# Altium PCB Intelligent_Agriculture_Power.PcbDoc
Units mil, origin at the board's own origin, x right, y up, seen from the top; angles counter-clockwise.
Board outline 3925 x 3925 mil, 2 copper layers (Top Layer, Bottom Layer); 35 components, 24 nets, 91 pads, 7 vias.
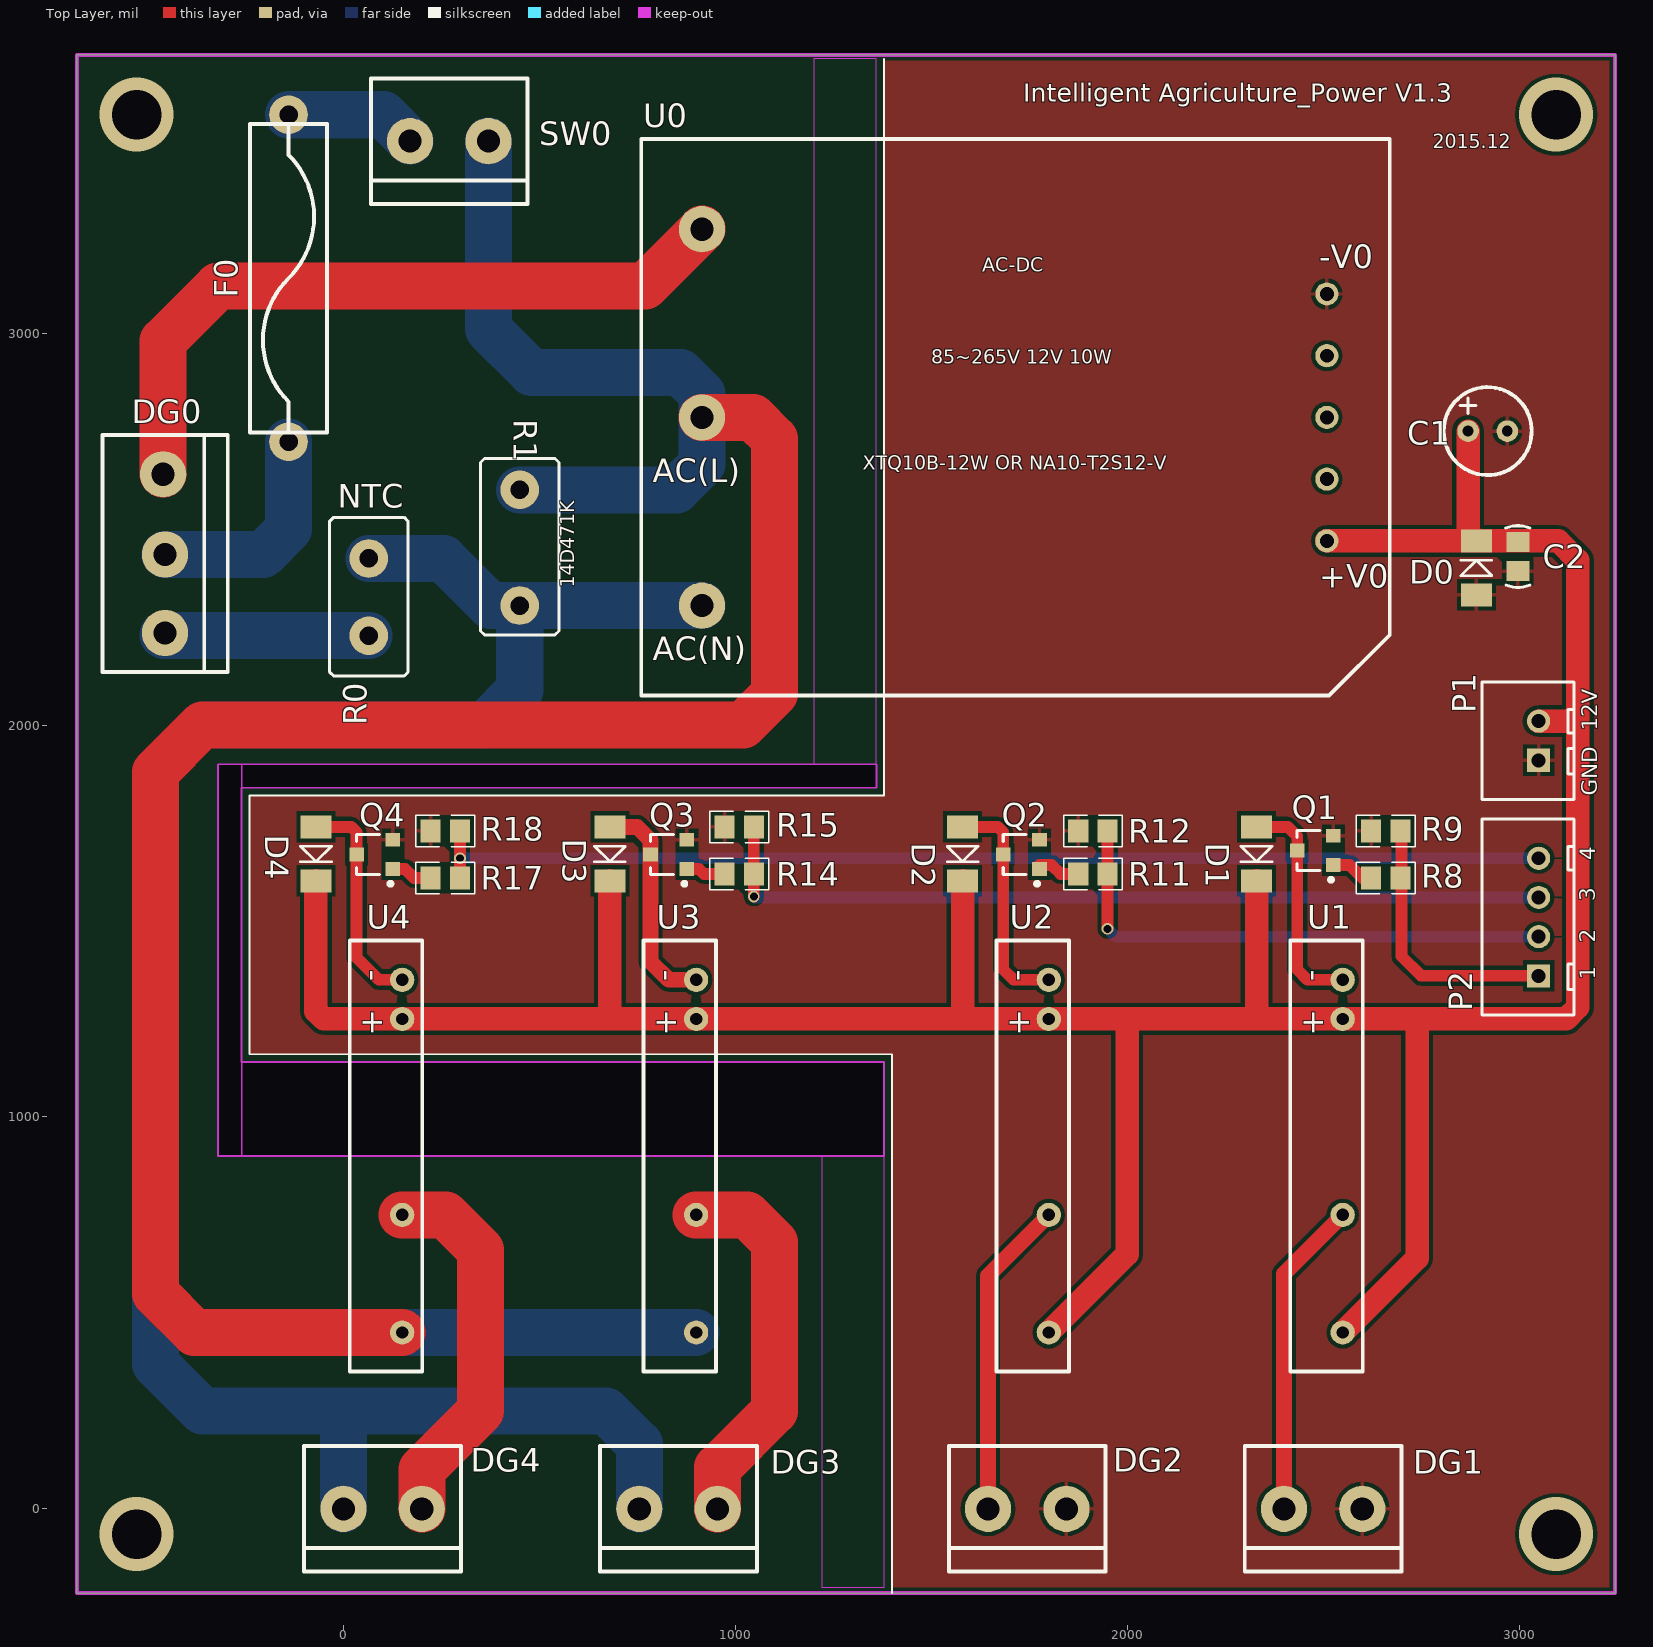
[diagram p0: Top Layer view]
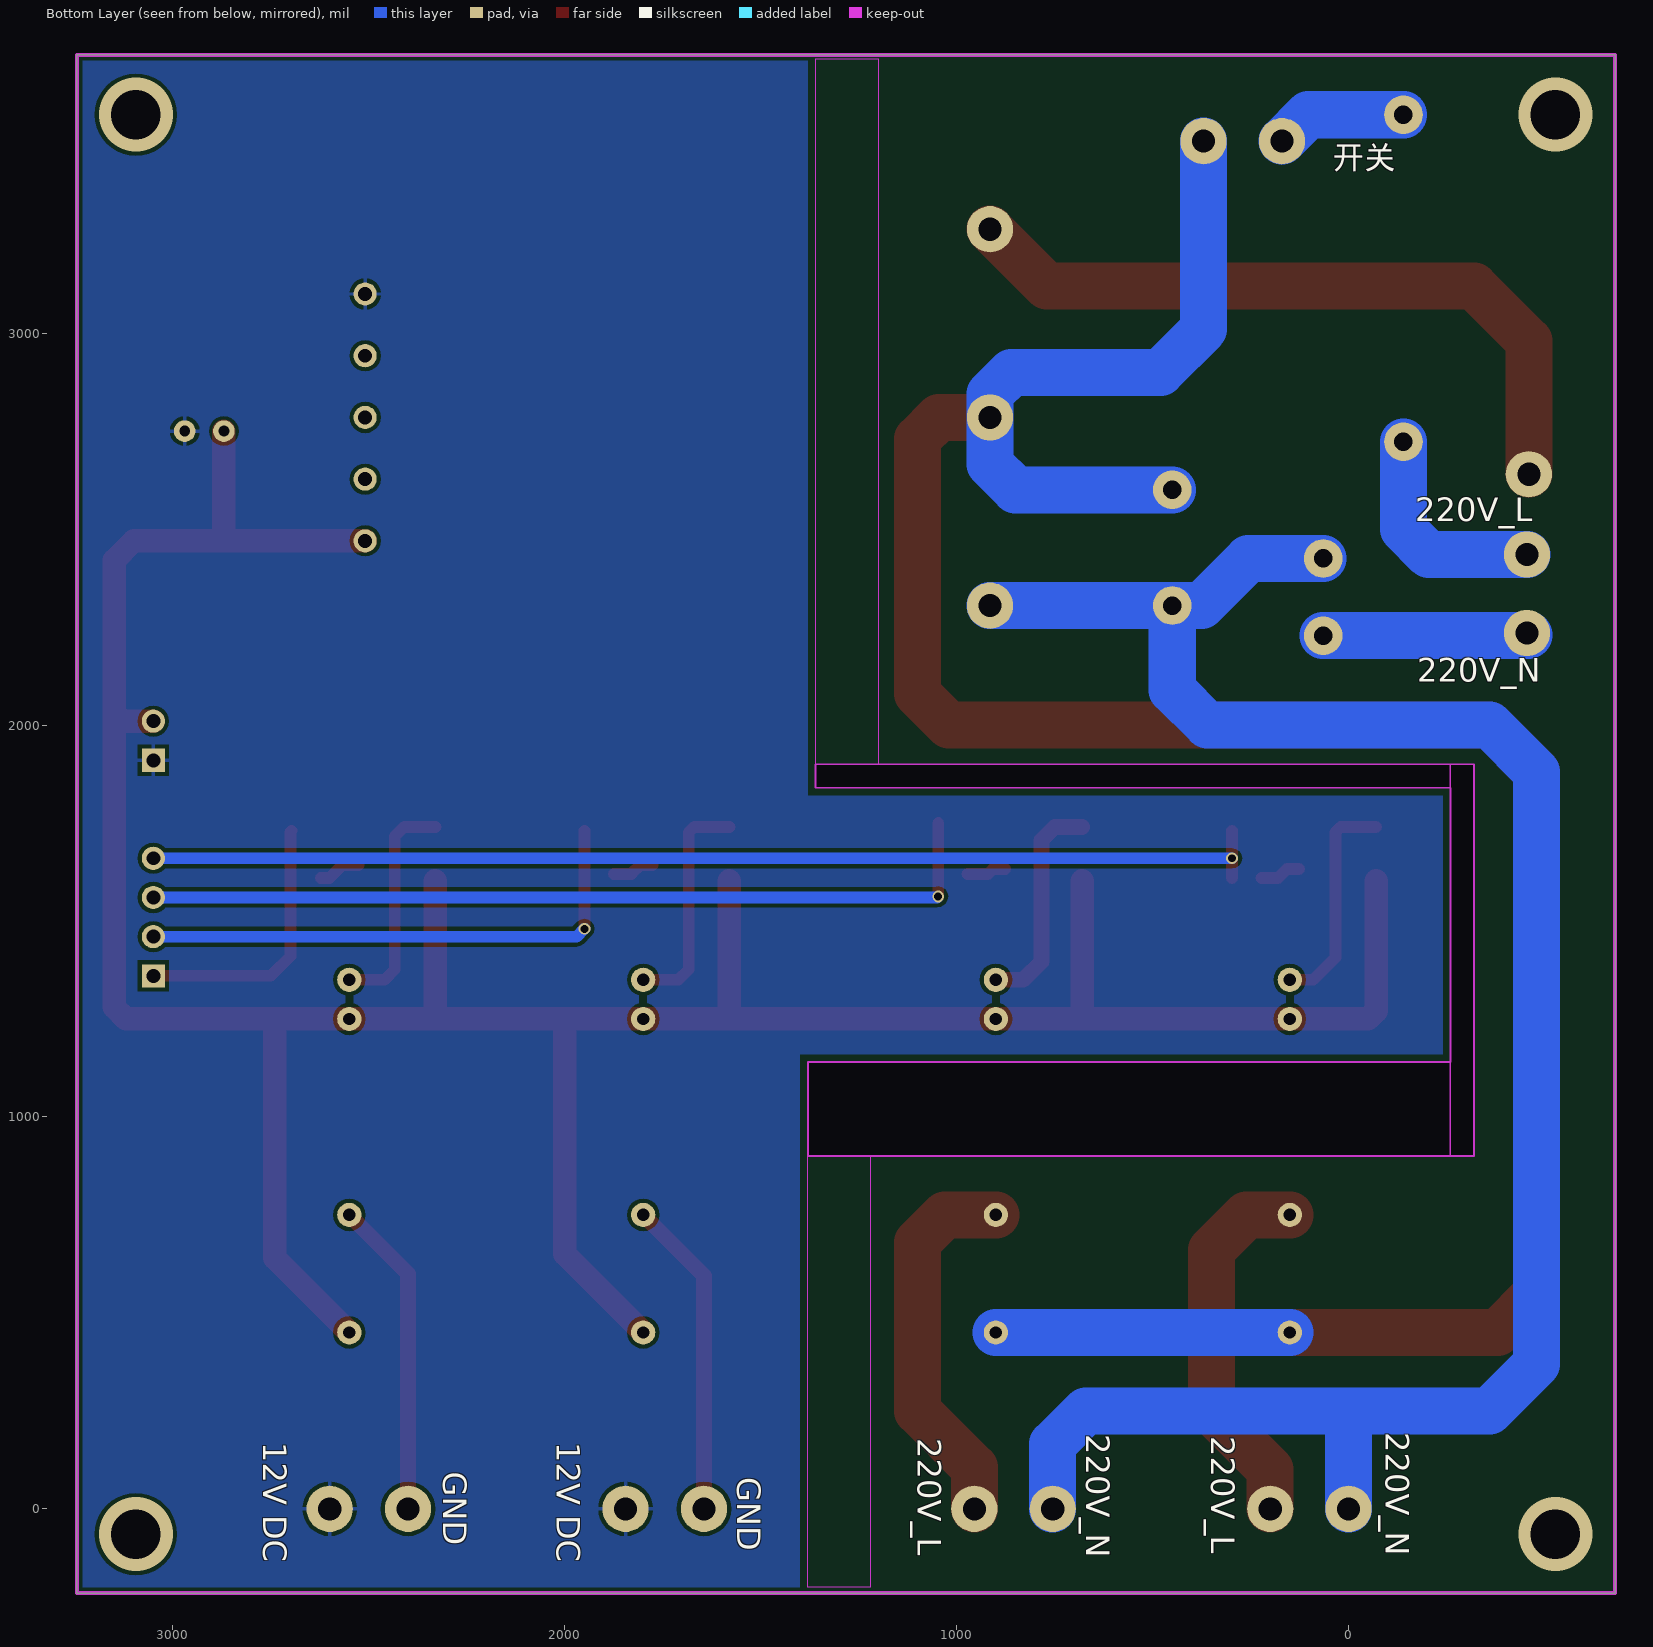
[diagram p1: Bottom Layer view, seen from below]

## Layer stack, top to bottom
Top Layer: signal copper 1.4
Dielectric: dielectric 12.6, FR-4, Dk 4.8
Bottom Layer: signal copper 1.4

## Board outline
-680,-215 3245,-215 3245,3710 -680,3710
cut-out: -320,1900 -320,900 -260,900 -260,1900
cut-out: -260,1900 -260,1840 1360,1840 1360,1900
cut-out: -260,900 1380,900 1380,1140 -260,1140

## Design rules (kind name [scope] priority, off if disabled: settings)
Clearance [All] p1: gap=10
PolygonConnect [All] p1: connectstyle=Relief reliefconductorwidth=10 reliefentries=4 polygonreliefangle="90 Angle"
RoutingVias [All] p1: holewidth=28 width=50 viastyle="Through Hole" minholewidth=28 minwidth=50 maxholewidth=28 maxwidth=50
SilkscreenOverComponentPads SilkToSolderMaskClearance [IsPad] p1: minsilkscreentomaskgap=10
SolderMaskExpansion [All] p1: expansion=4
Width [All] p1: maxlimit=120 minlimit=30 preferedwidth=30
27 further rules are at their usual default settings.

## Components (designator, comment, footprint, x,y, rotation, side; value= is the part's Value field where it differs from the comment)
C1 "Cap Pol1" C-RB-2.54 2920,2750 r0 top
C2 "Cap" C-RAD-0805 2997,2430 r270 top
D0 "Diode" DIODE-1206 2891,2332 r90 top
D1 "Diode" DIODE-1206 2330,1740 r270 top
D2 "Diode" DIODE-1206 1580,1740 r270 top
D3 "Diode" DIODE-1206 680,1740 r270 top
D4 "Diode" DIODE-1206 -70,1740 r270 top
DG0 "Header 3" DG301-3P -460,2440 r90 top
DG1 "Header 2" DG301-2P 2505,5 r0 top
DG2 "Header 2" DG301-2P 1750,5 r0 top
DG3 "Header 2" DG301-2P 860,5 r0 top
DG4 "Header 2" DG301-2P 105,5 r0 top
F0 "Fuse" FUSE-20*5*2A -140,3140 r90 top
P1 "Header 2" HDR2X1_B1 3050,1910 r90 top
P2 "Header 4" HDR4X1_B1 3050,1360 r90 top
Q1 "S8050" SOT-23 2480,1680 r90 top
Q2 "S8050" SOT-23 1730,1670 r90 top
Q3 "S8050" SOT-23 830,1670 r90 top
Q4 "S8050" SOT-23 80,1670 r90 top
R0 "NTC" "NTC 5D-9" 70,2325 r90 top
R1 "MOV" 14D471K 450,2305 r90 top
R8 "Res1" 0805-1 2660,1610 r0 top
R9 "Res1" 0805-1 2660,1730 r180 top
R11 "Res1" 0805-1 1912.6,1620 r0 top
R12 "Res1" 0805-1 1912.6,1730 r180 top
R14 "Res1" 0805-1 1010,1620 r0 top
R15 "Res1" 0805-1 1010,1740 r180 top
R17 "Res1" 0805-1 260,1610 r0 top
R18 "Res1" 0805-1 260,1730 r180 top
SW0 "Header 2" DG301-2P 275,3495 r0 top
U0 "ACDC_12V10W" ACDC_XTQ10B-12W 915,2785 r0 top
U1 "RL-G3MC-202P-DC12" RL-G3MC-202P-DC12 2550,450 r270 top
U2 "RL-G3MC-202P-DC12" RL-G3MC-202P-DC12 1800,450 r270 top
U3 "RL-G3MC-202P-DC12" RL-G3MC-202P-DC12 900,450 r270 top
U4 "RL-G3MC-202P-DC12" RL-G3MC-202P-DC12 150,450 r270 top

## Footprints (in the part's own frame and the unit in brackets; to place one, negate y for a bottom-side part, rotate by r counter-clockwise, add the part's x,y. Pads: shape width x height; smd on the part's side, far side on the other; paste and mask are expansions set on the pad)
14D471K [mm]
  round 2.5 hole 1.2: 1(0,0) 2(7.5,0)
  silkscreen extent -1.91,-2.54 9.53,2.54
0805-1 [mm]
  rect 1.3x1.5 smd: 1(-0.95,0) 2(0.95,0)
  silkscreen extent -1.91,-1.02 1.91,1.02, body extent -1.14,-0.51 1.14,0.51, height 1
ACDC_XTQ10B-12W [mm] "220VAC转12VDC模块X"
  round 3 hole 1.5: 1(0,12.2) 2(0,0) 3(0,-12.2)
  round 1.5 hole 0.9: 4(40.5,8) 5(40.5,4) 6(40.5,0) 7(40.5,-4) 8(40.5,-8)
  silkscreen extent -3.94,-18.03 44.58,18.03
C-RAD-0805 [mm]
  rect 1.3x1.5 smd: 1(-0.95,0) 2(0.95,0)
  silkscreen extent -2,-0.79 2,0.79, body extent -1.27,-0.64 1.27,0.64, height 0.9
C-RB-2.54 [mm]
  round 1.4 hole 0.7: 1(-1.27,0) 2(1.27,0)
  silkscreen extent -2.85,-2.85 2.85,2.85
DG301-2P [mm]
  round 3 hole 1.5: 1(-2.667,-0.127) 2(2.413,-0.127)
  silkscreen extent -5.21,-4.19 4.95,3.94
DG301-3P [mm]
  round 3 hole 1.5: 1(-5.207,-0.127) 2(-0.127,-0.127) 3(5.08,0)
  silkscreen extent -7.75,-4.19 7.62,3.94
DIODE-1206 [mm]
  rect 1.5x2 smd: 1(0,0) 2(3.5,0)
  silkscreen extent 1.25,-1 2.25,1
FUSE-20*5*2A [mm] "20*5*2A ²£Á"
  round 2.5 hole 1.2: 1(-10.6,0) 2(10.6,0)
  silkscreen extent -10,-2.5 10,2.5
HDR2X1_B1 [mm] "Connector; Header; 4"
  rect 1.5x1.5 hole 0.9: 1(0,0)
  round 1.5 hole 0.9: 2(2.54,0)
  silkscreen extent -2.54,-2.29 5.08,3.68, body extent -2.41,-2.16 5.08,3.56, height 1.5
HDR4X1_B1 [mm] "Connector; Header; 4"
  rect 1.5x1.5 hole 0.9: 1(0,0)
  round 1.5 hole 0.9: 2(2.54,0) 3(5.08,0) 4(7.62,0)
  silkscreen extent -2.54,-2.29 10.16,3.68, body extent -2.41,-2.16 10.03,3.56, height 1.5
"NTC 5D-9" [mm]
  round 2.5 hole 1.2: 1(-2.46,0.127) 2(2.54,0.127)
  silkscreen extent -5.08,-2.41 5.21,2.67
RL-G3MC-202P-DC12 [mm] "12V ¹"
  round 1.57 hole 0.8: 1(0,0) 2(-7.62,0) 3(-20.32,0) 4(-22.86,0)
  silkscreen extent -25.4,-3.4 2.54,1.3
SOT-23 [mm]
  rect 0.9x0.95 smd: 1(-0.95,-1.175) 2(0.95,-1.175) 3(0,1.175)
  silkscreen extent -2.03,-1.14 1.3,1.18

## Part data
C1: "µç½âµ"
C2: "无极性"
D0 D1 D2 D3 D4: "二极"
DG0: "接插"
DG1 DG2 DG3 DG4 P1 P2 SW0: library part He, "接插件"
F0: library part "Fuse 2", "保险丝"
Q1 Q2 Q3 Q4: library part BCP68, "NPN三极"
R0: "ÈÈÃôµ"
R1: "Ñ¹Ãôµ"
R8 R9 R11 R12 R14 R15 R17 R18: library part R, "ÌùÆ¬µ"
U0: library part ACDC_, "ACDC模块_220VAC转12VDC"
U1 U2 U3 U4: "12V 固态继电器"

## Via types
v1: diameter 188.98, hole 125.98, Top Layer to Bottom Layer, 4 vias
v2: diameter 30, hole 20, Top Layer to Bottom Layer, 3 vias

## Nets (pads, with @x,y where several pads share a name; then routed paths per layer and width w, separated by ;. In a path a pad name is that pad's centre, name@x,y a point inside that pad or via, vN(x,y) a via of type N, cw(c..) or ccw(c..) an arc to the next point about the centre after c; other vN are vias at no path point)
GND: C1.2 C2.2 D0.1 DG1.2 DG2.2 P1.1 Q1.2 Q2.2 Q3.2 Q4.2 R9.2 R12.2 R15.2 R18.2 U0.4
L220V: R1.2 SW0.2 U0.2 U3.1 U4.1 | length 7036.9
  Top Layer w120: U4.1 -380,450 -480,550 -480,1880 -360,2000 1020,2000 1100,2080 1100,2730 1045,2785 U0.2
  Bottom Layer w120: U4.1 U3.1 ; SW0.2 370,3010 480,2900 860,2900 915,2845 U0.2 915,2665.55 849.72,2600.28 R1.2
N220V: DG3.1 DG4.1 R0.2 R1.1 U0.3 | length 5366.3
  Bottom Layer w120: DG4.1 0,240 ; R0.2 255,2425 375,2305 R1.1 ; DG3.1 755,165 670,250 -360,250 -480,370 -480,1880 -360,2000 360,2000 450,2090 R1.1 ; U0.3@914.68,2305 R1.1
NetD1_1: D1.1 Q1.3 U1.4 | length 580.7
  Top Layer w30: D1.1 2410,1740 2433.74,1716.26 Q1.3 2433.74,1376.26 2460,1350 U1.4
NetD2_1: D2.1 Q2.3 U2.4 | length 586.6
  Top Layer w30: D2.1 1670,1740 1683.74,1726.26 1683.74,1680 1683.74,1376.26 1710,1350 U2.4
NetD3_1: D3.1 Q3.3 U3.4 | length 563.1
  Top Layer w40: D3.1 750,1740 783.74,1706.26 Q3.3 783.74,1396.26 830,1350 U3.4
NetD4_1: D4.1 Q4.3 U4.4 | length 569
  Top Layer w30: D4.1 20,1740 33.74,1726.26 Q4.3 33.74,1406.26 90,1350 U4.4
NetDG0_1: DG0.1 R0.1 | length 525.8
  Bottom Layer w120: DG0.1@-460,2230 -458.15,2228.15 R0.1
NetDG0_2: DG0.2 F0.1 | length 564.6
  Bottom Layer w120: DG0.2 -205,2435 -140,2500 F0.1
NetDG0_3: DG0.3 U0.1 | length 1833.2
  Top Layer w120: DG0.3 -460,2980 -320,3120 769.68,3120 U0.1
NetDG1_1: DG1.1 U1.2 | length 812.1
  Top Layer w40: DG1.1 2400,600 U1.2
NetDG2_1: DG2.1 U2.2 | length 814.2
  Top Layer w40: DG2.1 1645,595 U2.2
NetDG3_2: DG3.2 U3.2 | length 969.1
  Top Layer w120: U3.2 1030,750 1100,680 1100,250 955,105 DG3.2
NetDG4_2: DG4.2 U4.2 | length 959.4
  Top Layer w120: U4.2 260,750 350,660 350,250 200,100 DG4.2
NetF0_2: F0.2 SW0.1 | length 337.9
  Bottom Layer w120: F0.2 102.68,3557.32 SW0.1
NetQ1_1: Q1.1 R8.1 | length 109.8
  Top Layer w30: Q1.1 2567.4,1642.6 2600,1610 R8.1
NetQ2_1: Q2.1 R11.1 | length 108.3
  Top Layer w30: Q2.1@1776.26,1642.6 1807.4,1642.6 1830,1620 R11.1
NetQ3_1: Q3.1 R14.1 | length 101.6
  Top Layer w30: Q3.1 907.4,1632.6 920,1620 R14.1
NetQ4_1: Q4.1 R17.1 | length 105.7
  Top Layer w30: Q4.1 157.4,1632.6 180,1610 R17.1
RELAY1: P2.1 R8.2 R9.1 | length 691.8
  Top Layer w30: R9.1 2700,1727.4 2700,1410 2750,1360 P2.1
RELAY2: P2.2 R11.2 R12.1 | length 1358.3
  Top Layer w30: v2(1950,1480) R12.1
  Bottom Layer w30: v2(1950,1480) 1970,1460 P2.2
RELAY3: P2.3 R14.2 R15.1 | length 2187.4
  Top Layer w30: v2(1047.4,1562.6) R15.1@1047.4,1750
  Bottom Layer w30: v2@1050,1560 P2.3
RELAY4: P2.4 R17.2 R18.1 | length 2872.6
  Top Layer w30: R17.2 R18.1
  Bottom Layer w30: v2(297.4,1660) P2.4
VCC12V: C1.1 C2.1 D0.2 D1.2 D2.2 D3.2 D4.2 P1.2 U0.8 U1.1 U1.3 U2.1 U2.3 U3.3 U4.3 | length 8539.5
  Top Layer w60: D4.2 -70,1270 -50,1250 U4.3 710,1250 U3.3 1630,1250 U2.3 2000,1250 ; 680,1280 D3.2 ; 1580,1250 D2.2 ; U2.1 2000,650 2000,1250 ; 2330,1250 D1.2 ; U0.8 D0.2@2890.76,2470.04 ; U1.1 2740,640 2740,1230 ; C1.1 2870,2490.8 D0.2@2890.76,2470.04 ; D0.2 D0.2@2890.76,2470.04 ; P1.2 3130,2010 3150,2030 ; 2000,1250 2380,1250 U1.3 3120,1250 3150,1280 3150,2030 ; D0.2@2890.76,2470.04 2997,2470.04 3099.96,2470.04 3150,2420 3150,2030
pads on no net: U0.5 U0.6 U0.7
copper on no net:
  other v1: -527.52,-64.53 3094.53,-64.53 -527.52,3557.52 3094.53,3557.52

## Polygon pours and split planes (outlines as drawn)
GND on Top Layer "Keep-Out Layer-No Net" (solid, pour order 4): 1400,1160 -240,1160 -240,1820 1380,1820 1380,3710 3245,3710 3245,-215 1400,-215
GND on Bottom Layer "Keep-Out Layer-No Net" (solid, pour order 6): 1380,3710 1390,3700 3260,3700 3255,3700 3245,3710 3245,-215 1400,-215 1400,1160 -240,1160 -240,1820 1380,1820 1380,3700 1380,3710

## Keep-outs
Keep-Out Layer:
  region: 1360,3700 1200,3700 1200,1900 1360,1900
  rectangle: 1220,-200 1380,900
  lines w5: -320,900 -320,1900 1360,1900 1360,1840 -260,1840 -260,1140 1380,1140 1380,900 -320,900
  lines w10: -680,-215 -680,3710 3245,3710 3245,-215 -680,-215

## Silkscreen, mask and mechanical layers (free items; w line width, h text height)
Top Overlay:
  lines w5: -73,1160 1400,1160 1400,-215 ; -60,1160 -160,1160 -240,1160 -240,1820 1380,1820 1380,3700
  text "Intelligent Agriculture_Power V1.3" at 1735,3575 h80
  text "2015.12" at 2780,3460 h60
  text "12V" at 3200,1985 h40 r90
  text "GND" at 3200,1820 h40 r90
  text "4" at 3195,1655 h40 r90
  text "3" at 3195,1550 h40 r90
  text "2" at 3195,1445 h40 r90
  text "1" at 3195,1350 h40 r90
Bottom Overlay:
  text "开关" at 40,3400 h100
  text "220V_L" at -170,2520 h60
  text "220V_N" at -175,2110 h60
  text "220V_N" at -95,195 h60 r90
  text "220V_N" at 670,190 h60 r90
  text "220V_L" at 350,185 h60 r90
  text "220V_L" at 1100,180 h60 r90
  text "12V DC" at 2020,170 h60 r90
  text "12V DC" at 2770,170 h60 r90
  text "GND" at 2310,95 h60 r90
  text "GND" at 1560,80 h60 r90

## Text inside footprints (layer, text, board x,y; h text height)
R1: Top Overlay "14D471K" at 600,2350 h60 r90
U0: Top Overlay "85~265V 12V 10W" at 1500,2910 h60; Top Overlay "AC-DC" at 1630,3145 h60; Top Overlay "+V0" at 2490,2350 h60; Top Overlay "-V0" at 2490,3165 h60; Top Overlay "AC(L)" at 790,2620 h60; Top Overlay "AC(N)" at 790,2165 h60; Top Overlay "XTQ10B-12W OR NA10-T2S12-V" at 1325,2640 h60
U1: Top Overlay "-" at 2450,1375 h60 r270; Top Overlay "+" at 2450,1275 h60 r270
U2: Top Overlay "-" at 1700,1375 h60 r270; Top Overlay "+" at 1700,1275 h60 r270
U3: Top Overlay "-" at 800,1375 h60 r270; Top Overlay "+" at 800,1275 h60 r270
U4: Top Overlay "-" at 50,1375 h60 r270; Top Overlay "+" at 50,1275 h60 r270